# EAGLE board AniBike_v2.7_BT_SecondaryBoard (EAGLE 5.08)
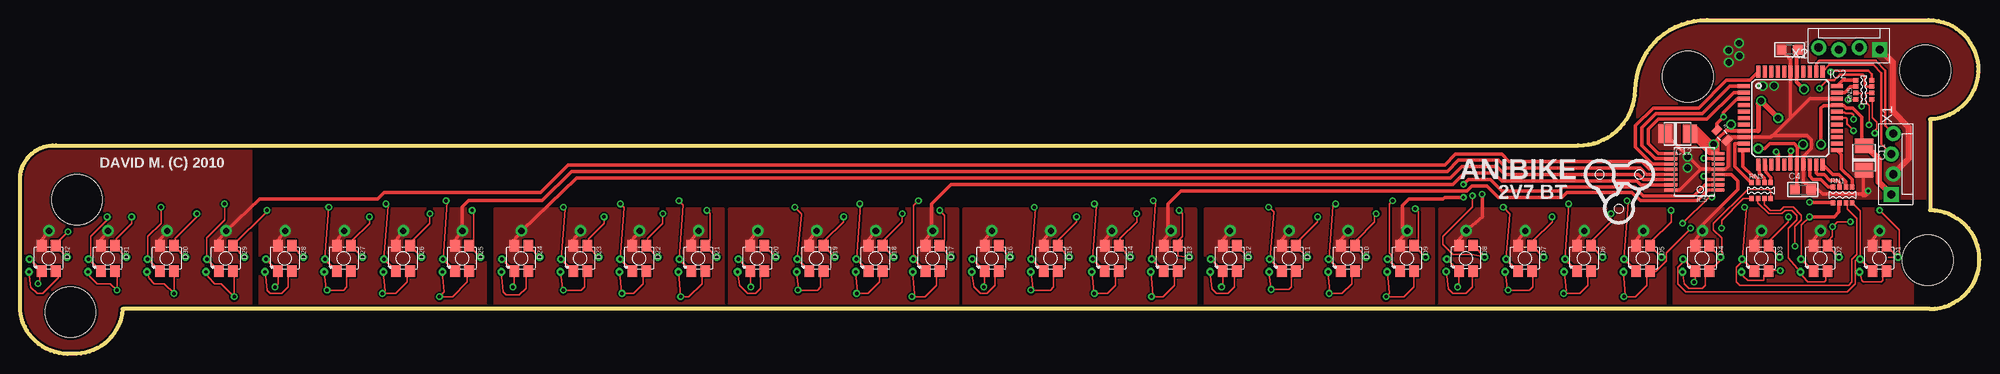
[diagram p0: board, top side]
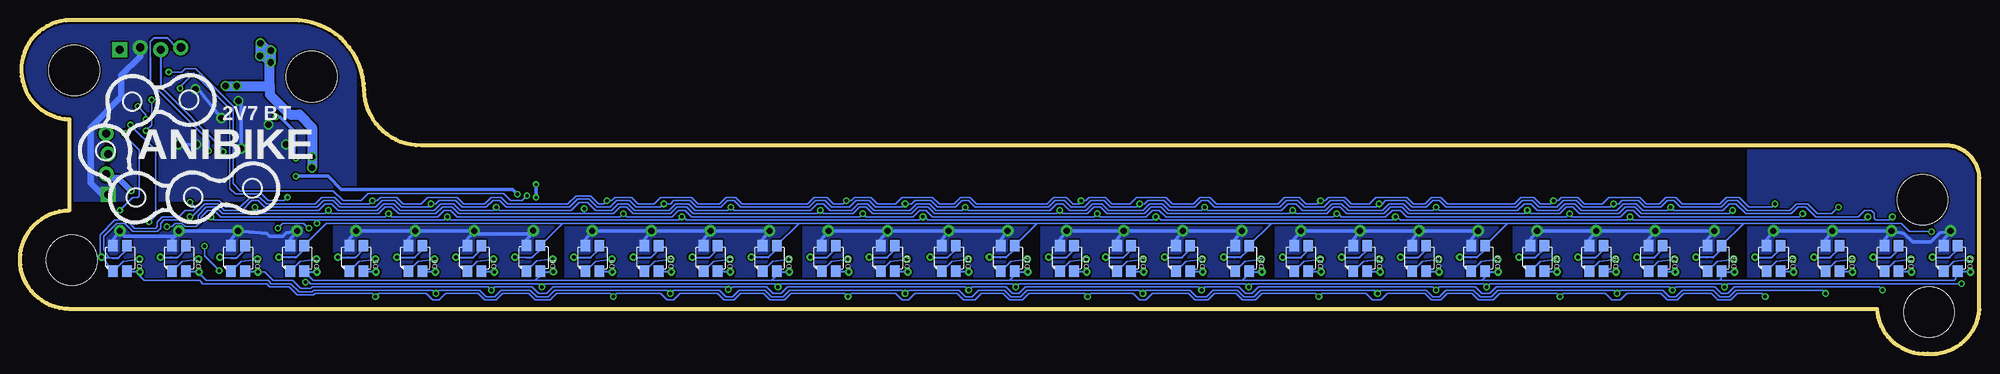
[diagram p1: board, bottom side, seen from below]

Size 244.4 x 41.68 mm. Coordinates in mm from the lower left corner, seen from the top.
Outline: 0,5.51 0,21.97 arc-90 4.47,26.03 194.36,26.03 arc90 201.47,32.94 arc-90 210.41,41.68 238.05,41.68 arc-178 238.25,29.28 238.25,17.9 arc-180 238.25,5.61 12.8,5.61 arc-90 6.5,0.02 arc-90 0,5.51
Copper layers (1*16): Top 0.035mm / dielectric 1.5mm / Bottom 0.035mm
Design rules "default *": minimum track width 7mil, minimum drill 15mil, track to track 8mil, track to pad 8mil, pad to pad 8mil, via to via 8mil, smd to smd 8mil, copper to edge 10mil, drill to drill 15mil, minimum pad ring 10mil, minimum via ring 8mil, stop-mask expansion 4mil, vias tented up to drill 32mil, thermal gap 10mil
Holes 6.35 mm at 237.95,11.71 237.64,35.38 6.3,5.2 208.03,34.62 7.11,19.22

## Footprints (pad centres in the part's own frame; a part is rotated, then mirrored left to right if it is on the bottom)
C0805 = smd 1.2 x 1.3: 1 -1.016,0; 2 1.016,0
C3528-21/T = smd 1.778 x 2.286: + 1.524,0; - -1.524,0
LED1210_DS = drill 0.432 pad 0.889 round: 1 -2.421,-0.099; 2 -2.504,-1.68; 3 2.27,0.15 | smd 1.2 x 1.4 bottom: 1_BOTTOM 0.85,-1.6; 2_BOTTOM -0.9,-1.6; 3_BOTTOM -0.9,1.6; 4_BOTTOM 0.85,1.6 | smd 1.2 x 1.4: 1_TOP -0.9,-1.6; 2_TOP 0.85,-1.6; 3_TOP 0.85,1.6; 4_TOP -0.9,1.6 | drill 0.762 pad 1.422 round: 4 0,3.454
TQFP44 = smd 1.5 x 0.5: 1 -5.8,4; 2 -5.8,3.2; 3 -5.8,2.4; 4 -5.8,1.6; 5 -5.8,0.8; 6 -5.8,0; 7 -5.8,-0.8; 8 -5.8,-1.6; 9 -5.8,-2.4; 10 -5.8,-3.2; 11 -5.8,-4; 23 5.8,-4; 24 5.8,-3.2; 25 5.8,-2.4; 26 5.8,-1.6; 27 5.8,-0.8; 28 5.8,0; 29 5.8,0.8; 30 5.8,1.6; 31 5.8,2.4; 32 5.8,3.2; 33 5.8,4 | smd 0.5 x 1.5: 12 -4,-5.8; 13 -3.2,-5.8; 14 -2.4,-5.8; 15 -1.6,-5.8; 16 -0.8,-5.8; 17 0,-5.8; 18 0.8,-5.8; 19 1.6,-5.8; 20 2.4,-5.8; 21 3.2,-5.8; 22 4,-5.8; 34 4,5.8; 35 3.2,5.8; 36 2.4,5.8; 37 1.6,5.8; 38 0.8,5.8; 39 0,5.8; 40 -0.8,5.8; 41 -1.6,5.8; 42 -2.4,5.8; 43 -3.2,5.8; 44 -4,5.8
TSSOP16 = smd 0.4 x 1.6: 1 -2.225,-2.85; 2 -1.575,-2.85; 3 -0.925,-2.85; 4 -0.275,-2.85; 5 0.375,-2.85; 6 1.025,-2.85; 7 1.675,-2.85; 8 2.325,-2.85; 9 2.325,3.05; 10 1.675,3.05; 11 1.025,3.05; 12 0.375,3.05; 13 -0.275,3.05; 14 -0.925,3.05; 15 -1.575,3.05; 16 -2.225,3.05
0805 = smd 0.8 x 1.2: 1 -0.9,0; 2 0.9,0
YCTC164 = smd 0.559 x 0.6: P$1 -1.2,-1.003; P$2 -0.4,-1.003; P$3 0.4,-1.003; P$4 1.2,-1.003; P$5 1.2,1.003; P$6 0.4,1.003; P$7 -0.4,1.003; P$8 -1.2,1.003
MOLEX-1X4_LOCK = drill 1.016 pad 1.88 square: 1 0,0.127 | drill 1.016 pad 1.88 round: 2 2.54,-0.127; 3 5.08,0.127; 4 7.62,-0.127

## Placement (x,y rotation side)
C3  100nF  [C0805]  220.73,37.97 180 top
C4  100nF  [C0805]  222.38,20.52 0 top
C11  47uF  [C3528-21/T]  230.02,24.46 270 top
C12  10uF  [C3528-21/T]  206.76,27.45 180 top
D1  LED_RGB_DS  [LED1210_DS]  231.95,11.91 0 top
D2  LED_RGB_DS  [LED1210_DS]  224.59,11.91 0 top
D3  LED_RGB_DS  [LED1210_DS]  217.22,11.91 0 top
D4  LED_RGB_DS  [LED1210_DS]  209.85,11.91 0 top
D5  LED_RGB_DS  [LED1210_DS]  202.49,11.91 0 top
D6  LED_RGB_DS  [LED1210_DS]  195.12,11.91 0 top
D7  LED_RGB_DS  [LED1210_DS]  187.76,11.91 0 top
D8  LED_RGB_DS  [LED1210_DS]  180.39,11.93 0 top
D9  LED_RGB_DS  [LED1210_DS]  173.02,11.91 0 top
D10  LED_RGB_DS  [LED1210_DS]  165.66,11.91 0 top
D11  LED_RGB_DS  [LED1210_DS]  158.29,11.91 0 top
D12  LED_RGB_DS  [LED1210_DS]  150.93,11.91 0 top
D13  LED_RGB_DS  [LED1210_DS]  143.56,11.91 0 top
D14  LED_RGB_DS  [LED1210_DS]  136.19,11.91 0 top
D15  LED_RGB_DS  [LED1210_DS]  128.57,11.91 0 top
D16  LED_RGB_DS  [LED1210_DS]  121.21,11.91 0 top
D17  LED_RGB_DS  [LED1210_DS]  113.84,11.91 0 top
D18  LED_RGB_DS  [LED1210_DS]  106.73,11.91 0 top
D19  LED_RGB_DS  [LED1210_DS]  99.36,11.91 0 top
D20  LED_RGB_DS  [LED1210_DS]  92,11.91 0 top
D21  LED_RGB_DS  [LED1210_DS]  84.63,11.91 0 top
D22  LED_RGB_DS  [LED1210_DS]  77.27,11.91 0 top
D23  LED_RGB_DS  [LED1210_DS]  69.9,11.91 0 top
D24  LED_RGB_DS  [LED1210_DS]  62.53,11.91 0 top
D25  LED_RGB_DS  [LED1210_DS]  55.17,11.91 0 top
D26  LED_RGB_DS  [LED1210_DS]  47.8,11.91 0 top
D27  LED_RGB_DS  [LED1210_DS]  40.44,11.91 0 top
D28  LED_RGB_DS  [LED1210_DS]  33.07,11.91 0 top
D29  LED_RGB_DS  [LED1210_DS]  25.7,11.91 0 top
D30  LED_RGB_DS  [LED1210_DS]  18.34,11.91 0 top
D31  LED_RGB_DS  [LED1210_DS]  10.97,11.91 0 top
D32  LED_RGB_DS  [LED1210_DS]  3.61,11.91 0 top
IC2  ATXMEGA_XX_D4TQFP44  [TQFP44]  220.83,29.43 0 top
IC5  SN74CB3Q3251TSSOP16  [TSSOP16]  208.94,22.68 90 top
R1  47k  [0805]  212.28,27.31 315 top
RN1  RESISTOR_ARR4  [YCTC164]  227.33,19.83 0 top
RN3  RESISTOR_ARR4  [YCTC164]  217.17,20.39 0 top
RN5  RESISTOR_ARR4  [YCTC164]  229.97,32.97 90 top
U$1  ANIBIKE_LOGOLOGO_3_MED  [ANIBIKE_LOGO_3_MEDIUM]  199.44,20.95 0 top
U$2  ANIBIKE_LOGOLOGO_6_BIG  [ANIBIKE_LOGO_6_BIG]  222.2,26.23 0 bottom
X1  PDI_INTERFACEHEADER0.1IN  [MOLEX-1X4_LOCK]  233.53,19.88 90 top
X2  ANIBIKE_SEC_INTERFACEHEADER0.1IN  [MOLEX-1X4_LOCK]  231.95,38.12 180 top

## Library data of the parts
C3 C11 C12 D1-D32 IC2 IC5 RN1 RN3 RN5 U$1 U$2 X1 X2 = AniBike_Common_Library
C4 = AniBike_v3.0_Library
R1 = SparkFun

## Nets
+3.6V: C3.2 C4.2 C11.+ C12.+ IC2.9 IC2.19 IC2.31 IC2.39 IC5.5 IC5.16 R1.2 X1.2 X2.1
GND: C3.1 C4.1 C11.- C12.- IC2.8 IC2.18 IC2.30 IC2.38 IC5.8 X1.1 X2.2
L1_B1: IC2.28 RN5.P$8
L1_B1_LED: D1.3 D1.3_BOTTOM D1.3_TOP D5.3 D5.3_BOTTOM D5.3_TOP D9.3 D9.3_BOTTOM D9.3_TOP D13.3 D13.3_BOTTOM D13.3_TOP D17.3 D17.3_BOTTOM D17.3_TOP D21.3 D21.3_BOTTOM D21.3_TOP D25.3 D25.3_BOTTOM D25.3_TOP D29.3 D29.3_BOTTOM D29.3_TOP RN5.P$1
L1_B2: IC2.29 RN5.P$7
L1_B2_LED: D2.3 D2.3_BOTTOM D2.3_TOP D6.3 D6.3_BOTTOM D6.3_TOP D10.3 D10.3_BOTTOM D10.3_TOP D14.3 D14.3_BOTTOM D14.3_TOP D18.3 D18.3_BOTTOM D18.3_TOP D22.3 D22.3_BOTTOM D22.3_TOP D26.3 D26.3_BOTTOM D26.3_TOP D30.3 D30.3_BOTTOM D30.3_TOP RN5.P$2
L1_B3: IC2.32 RN5.P$6
L1_B3_LED: D3.3 D3.3_BOTTOM D3.3_TOP D7.3 D7.3_BOTTOM D7.3_TOP D11.3 D11.3_BOTTOM D11.3_TOP D15.3 D15.3_BOTTOM D15.3_TOP D19.3 D19.3_BOTTOM D19.3_TOP D23.3 D23.3_BOTTOM D23.3_TOP D27.3 D27.3_BOTTOM D27.3_TOP D31.3 D31.3_BOTTOM D31.3_TOP RN5.P$3
L1_B4: IC2.33 RN5.P$5
L1_B4_LED: D4.3 D4.3_BOTTOM D4.3_TOP D8.3 D8.3_BOTTOM D8.3_TOP D12.3 D12.3_BOTTOM D12.3_TOP D16.3 D16.3_BOTTOM D16.3_TOP D20.3 D20.3_BOTTOM D20.3_TOP D24.3 D24.3_BOTTOM D24.3_TOP D28.3 D28.3_BOTTOM D28.3_TOP D32.3 D32.3_BOTTOM D32.3_TOP RN5.P$4
L1_G1: IC2.10 RN3.P$8
L1_G1_LED: D1.2 D1.2_BOTTOM D1.2_TOP D5.2 D5.2_BOTTOM D5.2_TOP D9.2 D9.2_BOTTOM D9.2_TOP D13.2 D13.2_BOTTOM D13.2_TOP D17.2 D17.2_BOTTOM D17.2_TOP D21.2 D21.2_BOTTOM D21.2_TOP D25.2 D25.2_BOTTOM D25.2_TOP D29.2 D29.2_BOTTOM D29.2_TOP RN3.P$1
L1_G2: IC2.11 RN3.P$7
L1_G2_LED: D2.2 D2.2_BOTTOM D2.2_TOP D6.2 D6.2_BOTTOM D6.2_TOP D10.2 D10.2_BOTTOM D10.2_TOP D14.2 D14.2_BOTTOM D14.2_TOP D18.2 D18.2_BOTTOM D18.2_TOP D22.2 D22.2_BOTTOM D22.2_TOP D26.2 D26.2_BOTTOM D26.2_TOP D30.2 D30.2_BOTTOM D30.2_TOP RN3.P$2
L1_G3: IC2.12 RN3.P$6
L1_G3_LED: D3.2 D3.2_BOTTOM D3.2_TOP D7.2 D7.2_BOTTOM D7.2_TOP D11.2 D11.2_BOTTOM D11.2_TOP D15.2 D15.2_BOTTOM D15.2_TOP D19.2 D19.2_BOTTOM D19.2_TOP D23.2 D23.2_BOTTOM D23.2_TOP D27.2 D27.2_BOTTOM D27.2_TOP D31.2 D31.2_BOTTOM D31.2_TOP RN3.P$3
L1_G4: IC2.13 RN3.P$5
L1_G4_LED: D4.2 D4.2_BOTTOM D4.2_TOP D8.2 D8.2_BOTTOM D8.2_TOP D12.2 D12.2_BOTTOM D12.2_TOP D16.2 D16.2_BOTTOM D16.2_TOP D20.2 D20.2_BOTTOM D20.2_TOP D24.2 D24.2_BOTTOM D24.2_TOP D28.2 D28.2_BOTTOM D28.2_TOP D32.2 D32.2_BOTTOM D32.2_TOP RN3.P$4
L1_R1: IC2.20 RN1.P$8
L1_R1_LED: D1.1 D1.1_BOTTOM D1.1_TOP D5.1 D5.1_BOTTOM D5.1_TOP D9.1 D9.1_BOTTOM D9.1_TOP D13.1 D13.1_BOTTOM D13.1_TOP D17.1 D17.1_BOTTOM D17.1_TOP D21.1 D21.1_BOTTOM D21.1_TOP D25.1 D25.1_BOTTOM D25.1_TOP D29.1 D29.1_BOTTOM D29.1_TOP RN1.P$1
L1_R2: IC2.21 RN1.P$7
L1_R2_LED: D2.1 D2.1_BOTTOM D2.1_TOP D6.1 D6.1_BOTTOM D6.1_TOP D10.1 D10.1_BOTTOM D10.1_TOP D14.1 D14.1_BOTTOM D14.1_TOP D18.1 D18.1_BOTTOM D18.1_TOP D22.1 D22.1_BOTTOM D22.1_TOP D26.1 D26.1_BOTTOM D26.1_TOP D30.1 D30.1_BOTTOM D30.1_TOP RN1.P$2
L1_R3: IC2.22 RN1.P$6
L1_R3_LED: D3.1 D3.1_BOTTOM D3.1_TOP D7.1 D7.1_BOTTOM D7.1_TOP D11.1 D11.1_BOTTOM D11.1_TOP D15.1 D15.1_BOTTOM D15.1_TOP D19.1 D19.1_BOTTOM D19.1_TOP D23.1 D23.1_BOTTOM D23.1_TOP D27.1 D27.1_BOTTOM D27.1_TOP D31.1 D31.1_BOTTOM D31.1_TOP RN1.P$3
L1_R4: IC2.23 RN1.P$5
L1_R4_LED: D4.1 D4.1_BOTTOM D4.1_TOP D8.1 D8.1_BOTTOM D8.1_TOP D12.1 D12.1_BOTTOM D12.1_TOP D16.1 D16.1_BOTTOM D16.1_TOP D20.1 D20.1_BOTTOM D20.1_TOP D24.1 D24.1_BOTTOM D24.1_TOP D28.1 D28.1_BOTTOM D28.1_TOP D32.1 D32.1_BOTTOM D32.1_TOP RN1.P$4
MUX_D0: IC2.44 IC5.11
MUX_D1: IC2.1 IC5.10
MUX_D2: IC2.2 IC5.9
MUX_EN: IC2.3 IC5.7 R1.1
PDI_CLOCK: IC2.35 X1.4
PDI_DATA: IC2.34 X1.3
ROW1_LED: D1.4 D1.4_BOTTOM D1.4_TOP D2.4 D2.4_BOTTOM D2.4_TOP D3.4 D3.4_BOTTOM D3.4_TOP D4.4 D4.4_BOTTOM D4.4_TOP IC5.4
ROW2_LED: D5.4 D5.4_BOTTOM D5.4_TOP D6.4 D6.4_BOTTOM D6.4_TOP D7.4 D7.4_BOTTOM D7.4_TOP D8.4 D8.4_BOTTOM D8.4_TOP IC5.3
ROW3_LED: D9.4 D9.4_BOTTOM D9.4_TOP D10.4 D10.4_BOTTOM D10.4_TOP D11.4 D11.4_BOTTOM D11.4_TOP D12.4 D12.4_BOTTOM D12.4_TOP IC5.2
ROW4_LED: D13.4 D13.4_BOTTOM D13.4_TOP D14.4 D14.4_BOTTOM D14.4_TOP D15.4 D15.4_BOTTOM D15.4_TOP D16.4 D16.4_BOTTOM D16.4_TOP IC5.1
ROW5_LED: D17.4 D17.4_BOTTOM D17.4_TOP D18.4 D18.4_BOTTOM D18.4_TOP D19.4 D19.4_BOTTOM D19.4_TOP D20.4 D20.4_BOTTOM D20.4_TOP IC5.15
ROW6_LED: D21.4 D21.4_BOTTOM D21.4_TOP D22.4 D22.4_BOTTOM D22.4_TOP D23.4 D23.4_BOTTOM D23.4_TOP D24.4 D24.4_BOTTOM D24.4_TOP IC5.14
ROW7_LED: D25.4 D25.4_BOTTOM D25.4_TOP D26.4 D26.4_BOTTOM D26.4_TOP D27.4 D27.4_BOTTOM D27.4_TOP D28.4 D28.4_BOTTOM D28.4_TOP IC5.13
ROW8_LED: D29.4 D29.4_BOTTOM D29.4_TOP D30.4 D30.4_BOTTOM D30.4_TOP D31.4 D31.4_BOTTOM D31.4_TOP D32.4 D32.4_BOTTOM D32.4_TOP IC5.12
SEC_CS: IC2.14
SEC_MISO: IC2.16
SEC_MOSI: IC2.15 X2.3
SEC_SCK: IC2.17 X2.4

## Tracks (layer width: path | path; a pad name or v marks a point on that pad's centre or on a via)
+3.6V  (via drill 0.41, 0.8)
  Top 0.406: 209.63,23.05 C12.+ | 209.63,23.05 IC5.5 212.72,23.05 213.06,23.39 213.06,26.64 213.46,27.05 215.02,27.05 IC2.9 215.04,27.05 218.34,27.05 218.64,27.25 | 209.63,23.05 207.03,20.45 IC5.16 | C3.2 220.83,36.75 IC2.39 220.83,29.43 | C11.+ 229.92,22.22 229.92,19.94 224.84,19.94 224.26,20.52 C4.2 222.43,21.48 IC2.19 222.43,24.63 223.42,25.62 223.42,26.74 222.91,27.25 218.64,27.25 | 218.64,27.25 220.83,29.43 | 220.83,29.43 223.23,31.83 IC2.31
  Top 0.813: X2.1 231.98,37.99 233.58,36.39 233.58,30.3 235.61,28.27 235.61,24.38 X1.2 233.66,22.45 | v230.53,20.34 230.12,19.94 229.92,19.94
  Bottom 0.813: X1.2 233.2,21.97 232.16,21.97 v230.53,20.34
  Bottom 1.27: v218.8,33.45 213.23,33.45 | 213.23,33.45 213.23,32.38 210.74,29.89 209.58,29.89 209.42,29.74 207.98,28.27 v207.98,24.61 v207.98,23.21 | 213.23,33.45 213.23,36.27 213.08,36.42 213.08,37.92 213.56,37.92 214.43,38.78 214.43,37.18 214.45,37.16 213.94,37.16 213.16,36.37
  other vias: 217.37,33.45 213.13,36.39 213.08,37.89 214.45,37.18 214.4,38.78
  pour Top (no thermals): 244.55,43.51 201.78,43.51 201.78,19.43 244.55,19.43
GND  (via drill 0.8)
  Top 0.203: IC5.8 211.8,25.02
  Top 0.406: C12.- 210.73,25 IC5.8 211.79,26.4 | 212.8,27.86 211.79,26.85 211.79,26.4 | 221.63,37.75 C3.1 | C11.- 229.72,26.49 229.72,29.59 228.6,30.7 227.79,30.7 227.48,31.01 227.38,31.01 IC2.30 226.6,31.01 224.99,31.01 224.64,30.65 v224.64,26.13 | C4.1 221.63,20.79 IC2.18 221.69,23.7 221.69,25.83 | 221.69,25.83 221.29,26.23 218.24,26.23 217.63,25.62 v216.81,25.62 | 216.81,27.86 216.79,27.83 | v222.4,26.13 222.1,25.83 221.69,25.83 | 211.79,26.4 211.74,26.4 211.44,26.11 211.44,25.08 211.1,25.08 211.09,25.09 211.09,25.29 | 211.09,25.29 211.09,26.06 211.11,26.08 211.11,26.16 211.53,26.58 | 211.53,26.58 211.71,26.76 | 211.09,25.29 210.81,25.29 209.03,27.07 209.03,27.44 208.99,27.48 208.99,27.45 211.11,25.33 211.11,25.75 208.95,27.91 208.95,28.2 208.97,28.22 209.19,28.22 211.07,26.34 | 211.53,26.58 210.76,26.58 210.38,26.96
  Top 0.508: 212.8,27.86 213.58,27.83 IC2.8 216.79,27.83 | 221.63,37.75 IC2.38 221.63,33.92 v222.5,33.04
  Top 0.61: 216.81,27.86 216.81,31.21 v217.17,31.57 v219.3,29.43 | v213.4,28.62 213.4,27.91
  Top 0.813: X1.1 231.85,21.43 231.85,24.3 230.18,25.98 C11.-
  Bottom 0.406: v216.81,25.62 216.81,31.21 v217.17,31.57 | v219.3,29.43 222.2,33.04 v222.5,33.04 | v224.64,26.13 v222.4,26.13
  Bottom 0.813: X2.2 229.41,37.11 231.75,34.77 231.75,32.13 235.61,28.27 235.61,21.36 234.19,19.94 233.45,19.94 X1.1
  other vias: 211.25,26.13
  pour Bottom (no thermals): 236.93,43.71 202.59,43.71 202.59,19.22 244.75,19.22 244.75,39.65
L1_B1  (via drill 0.41)
  Top 0.203: v227.99,31.72 228.72,31.72 RN5.P$8
  Top 0.254: IC2.28 227.74,29.43 227.89,29.28 227.89,28.67 v228.7,27.86
  Bottom 0.203: v228.7,27.86 227.99,28.57 v227.99,31.72
L1_B1_LED  (via drill 0.41, 0.43)
  Top 0.203: 203.49,13.36 203.49,14.03 205.94,16.48 v205.94,17.9 | D29.3_TOP 30.79,17.74 v30.79,17.9 | v56.39,17.9 56.59,17.7 56.59,14.04 56.06,13.51 D25.3_TOP 56.17,13.36 D25.3 | v85.65,17.9 86.06,17.5 86.06,14.25 85.48,13.67 D21.3_TOP 85.63,13.36 D21.3 | v114.71,17.9 115.32,17.29 115.32,14.25 114.69,13.62 D17.3_TOP 114.84,13.36 D17.3 | v144.58,17.9 144.98,17.5 144.98,14.65 144.41,14.08 D13.3_TOP 144.41,12.21 D13.3 | v174.04,18.11 174.45,17.7 174.45,14.25 173.88,13.67 D9.3_TOP | D1.3_TOP 232.84,13.51 | RN5.P$1 231.04,31.7 231.04,29.49 231.6,28.93 231.6,28.11 231.34,27.86 v231.34,27.56 231.34,27.66 | D1.3 233,12.01 233.99,12.01 234.39,12.42 234.39,15.46 v231.95,17.9
  Top 0.254: D1.3 232.95,13.36 D1.3_TOP | D5.3 203.49,13.36 D5.3_TOP | D9.3 174.03,13.36 D9.3_TOP | D29.3_TOP 26.71,13.36 D29.3
  Bottom 0.203: v30.79,17.9 31.19,17.5 42.16,17.5 42.98,18.31 44.2,18.31 45.01,17.5 49.89,17.5 50.7,18.31 51.51,18.31 52.32,17.5 55.98,17.5 v56.39,17.9 56.79,17.5 71.22,17.5 72.03,18.31 73.46,18.31 74.27,17.5 78.94,17.5 79.76,18.31 80.57,18.31 81.38,17.5 85.24,17.5 v85.65,17.9 86.06,17.5 101.3,17.5 102.11,18.31 103.33,18.31 104.14,17.5 108.81,17.5 109.63,18.31 110.44,18.31 111.25,17.5 114.3,17.5 v114.71,17.9 115.11,17.5 130.35,17.5 131.17,18.31 132.38,18.31 133.2,17.5 138.07,17.5 138.89,18.31 139.7,18.31 140.51,17.5 144.17,17.5 v144.58,17.9 144.98,17.5 160.43,17.5 161.24,18.31 162.46,18.31 163.27,17.5 167.94,17.5 168.76,18.31 169.57,18.31 170.38,17.5 174.04,17.5 | 174.04,17.5 v174.04,18.11 | 174.04,17.5 189.69,17.5 190.5,18.31 191.72,18.31 192.53,17.5 197.21,17.5 198.02,18.31 198.83,18.31 199.64,17.5 205.54,17.5 v205.94,17.9 206.35,17.5 219.15,17.5 219.96,18.31 221.18,18.31 222.2,17.29 222.2,16.68 222.61,16.28 223.62,16.28 224.03,16.68 226.47,16.68 226.87,16.28 226.87,15.67 227.28,15.26 230.33,15.26 231.34,16.28 232.36,16.28 233.99,14.65 233.99,13.03 233.32,12.06 D1.3 | v231.95,17.9 230.33,19.53 229.72,19.53 229.51,19.73 229.51,25.42 231.34,27.25 v231.34,27.56
  Bottom 0.254: D1.3_BOTTOM 231.05,13.04 232.13,11.96 232.85,11.96 D1.3 | D5.3_BOTTOM 201.59,13.04 202.56,12.06 203.49,12.06 D5.3 | D9.3_BOTTOM 172.12,13.11 173.23,12.01 173.98,12.01 D9.3 | D13.3_BOTTOM 142.66,13.11 143.76,12.01 144.51,12.01 D13.3 | D17.3_BOTTOM 112.94,12.96 113.89,12.01 114.79,12.01 D17.3 | D21.3_BOTTOM 83.73,12.91 84.63,12.01 85.58,12.01 D21.3 | D25.3_BOTTOM 54.27,13.11 55.37,12.01 56.12,12.01 D25.3 | D29.3_BOTTOM 24.81,13.11 25.91,12.01 26.66,12.01 D29.3
L1_B2  (via drill 0.41)
  Top 0.203: 226.77,30.1 226.67,30.2 IC2.29 226.77,30.1 | v229.72,30.91 229.72,32.33 229.51,32.53 228.8,32.53 RN5.P$7
  Top 0.254: v228.7,29.28 228.7,29.79 228.5,29.99 227.69,29.99 227.58,30.1 226.77,30.1
  Bottom 0.203: v228.7,29.28 228.7,29.89 v229.72,30.91
L1_B2_LED  (via drill 0.41, 0.43)
  Top 0.203: 19.34,13.36 19.34,14.38 22.05,17.09 v22.05,17.5 | 48.8,13.36 48.8,13.98 51.11,16.28 v51.11,17.5 | 78.27,13.36 78.27,14.38 80.16,16.28 v80.16,17.5 | 107.73,13.36 107.73,14.18 110.03,16.48 v110.03,17.5 | 137.19,13.36 137.19,14.38 139.29,16.48 v139.29,17.5 | 166.66,13.36 166.66,14.18 168.96,16.48 168.96,17.29 v169.16,17.5 | 196.12,13.36 196.12,14.18 198.43,16.48 v198.43,17.5 | 225.59,14.18 226.06,14.65 v226.06,15.87 226.67,16.48 v228.3,16.48 | RN5.P$2 230.94,32.53 230.33,32.53 230.23,32.43 230.23,31.42 230.63,31.01 v230.63,28.57
  Top 0.254: 225.59,13.36 D2.3 | 225.59,13.36 D2.3_TOP | D6.3 196.12,13.36 D6.3_TOP | D10.3 166.66,13.36 D10.3_TOP | D14.3 137.19,13.36 D14.3_TOP | D18.3 107.73,13.36 D18.3_TOP | D22.3 78.27,13.36 D22.3_TOP | D26.3 48.8,13.36 D26.3_TOP | D30.3 19.34,13.36 D30.3_TOP | 225.59,14.18 225.59,13.36
  Bottom 0.203: v22.05,17.5 22.45,17.09 42.37,17.09 43.18,17.9 43.99,17.9 44.81,17.09 50.9,17.09 51.11,17.29 v51.11,17.5 51.51,17.09 71.43,17.09 72.24,17.9 73.25,17.9 74.07,17.09 79.55,17.09 79.96,17.5 v80.16,17.5 80.57,17.09 101.5,17.09 102.31,17.9 103.12,17.9 103.94,17.09 109.63,17.09 v110.03,17.5 110.44,17.09 130.56,17.09 131.37,17.9 132.18,17.9 132.99,17.09 138.89,17.09 v139.29,17.5 139.7,17.09 160.63,17.09 161.44,17.9 162.25,17.9 163.07,17.09 168.76,17.09 v169.16,17.5 169.57,17.09 189.89,17.09 190.7,17.9 191.52,17.9 192.33,17.09 198.02,17.09 v198.43,17.5 198.83,17.09 219.35,17.09 220.17,17.9 220.98,17.9 221.79,17.09 221.79,16.48 222.4,15.87 223.83,15.87 224.23,16.28 225.04,16.28 225.45,15.87 v226.06,15.87 | v228.3,16.48 227.48,17.29 227.48,25.42 v230.63,28.57
  Bottom 0.254: D2.3_BOTTOM 223.69,13.14 224.77,12.06 225.58,12.06 D2.3 | D6.3_BOTTOM 194.22,12.96 195.17,12.01 196.07,12.01 D6.3 | D10.3_BOTTOM 164.76,12.96 165.71,12.01 166.61,12.01 D10.3 | D14.3_BOTTOM 135.3,12.96 136.25,12.01 137.15,12.01 D14.3 | D18.3_BOTTOM 105.83,12.96 106.78,12.01 107.68,12.01 D18.3 | D22.3_BOTTOM 76.37,12.96 77.32,12.01 78.22,12.01 D22.3 | D26.3_BOTTOM 46.9,12.96 47.85,12.01 48.75,12.01 D26.3 | D30.3_BOTTOM 17.44,13.16 18.59,12.01 19.29,12.01 D30.3
L1_B3
  Top 0.406: IC2.32 227.58,32.63 228.31,33.37 RN5.P$6
L1_B3_LED  (via drill 0.41, 0.43)
  Top 0.203: 11.97,13.36 11.97,14.33 13.92,16.28 v13.92,17.09 | 41.44,13.36 41.44,14.13 43.59,16.28 v43.59,17.09 | 70.9,13.36 70.9,14.33 72.85,16.28 v72.85,17.09 | 100.37,13.36 100.37,14.13 102.72,16.48 v102.72,17.09 | 129.58,13.36 129.58,14.28 131.78,16.48 v131.78,17.09 | 159.29,13.36 159.29,13.92 161.85,16.48 v161.85,17.09 | 188.76,13.36 188.76,14.13 191.11,16.48 v191.11,17.09 | 218.22,13.36 218.22,14.13 220.57,16.48 v220.57,17.09 | v211.02,19.53 210.62,19.53 v207.37,16.28
  Top 0.254: D3.3 218.22,13.36 D3.3_TOP | D7.3 188.76,13.36 D7.3_TOP | D11.3 159.29,13.36 D11.3_TOP | D15.3 129.58,13.36 D15.3_TOP | D19.3 100.37,13.36 D19.3_TOP | D23.3 70.9,13.36 D23.3_TOP | D27.3 41.44,13.36 D27.3_TOP | D31.3 11.97,13.36 D31.3_TOP
  Top 0.305: RN5.P$3 230.31,33.37 230.12,33.55 230.12,34.57 229.82,34.87 226.97,34.87 226.26,34.16 225.45,34.16 v224.43,33.14
  Bottom 0.203: v13.92,17.09 14.33,16.68 43.18,16.68 v43.59,17.09 43.99,16.68 72.24,16.68 72.64,17.09 v72.85,17.09 73.25,16.68 102.11,16.68 102.51,17.09 v102.72,17.09 103.12,16.68 131.17,16.68 131.57,17.09 v131.78,17.09 132.18,16.68 161.24,16.68 161.65,17.09 v161.85,17.09 162.25,16.68 190.7,16.68 v191.11,17.09 191.52,16.68 207.37,16.68 | 207.37,16.68 220.17,16.68 v220.57,17.09 | v211.02,19.53 211.43,19.12 213.46,19.12 214.27,19.94 217.53,19.94 218.24,20.65 218.24,30.6 222.71,35.07 224.43,33.35 v224.43,33.14 | v207.37,16.28 207.37,16.68
  Bottom 0.254: D3.3_BOTTOM 216.32,13.04 217.4,11.96 218.12,11.96 D3.3 | D7.3_BOTTOM 186.86,13.01 187.86,12.01 188.71,12.01 D7.3 | D11.3_BOTTOM 157.39,13.01 158.39,12.01 159.24,12.01 D11.3 | D15.3_BOTTOM 127.68,13.06 128.73,12.01 129.53,12.01 D15.3 | D19.3_BOTTOM 98.47,13.01 99.47,12.01 100.32,12.01 D19.3 | D23.3_BOTTOM 69,13.01 70,12.01 70.85,12.01 D23.3 | D27.3_BOTTOM 39.54,13.01 40.54,12.01 41.39,12.01 D27.3 | D31.3_BOTTOM 10.07,13.01 11.07,12.01 11.92,12.01 D31.3
L1_B4
  Top 0.406: IC2.33 227.36,34.17 RN5.P$5
L1_B4_LED  (via drill 0.41, 0.43)
  Top 0.203: 4.61,13.36 4.61,13.87 v5.99,15.26 | v181.15,19.73 181.15,18.31 177.5,14.65 177.5,13.64 178.71,12.42 181.06,12.42 D8.3
  Top 0.254: D4.3 210.86,13.36 D4.3_TOP | D8.3 181.39,13.38 D8.3_TOP | D12.3 151.93,13.36 D12.3_TOP | D16.3 122.21,13.36 D16.3_TOP | D20.3 93,13.36 D20.3_TOP | D24.3 63.54,13.36 D24.3_TOP | D32.3 4.61,13.36 D32.3_TOP | D28.3_TOP 34.07,13.36 D28.3
  Top 0.305: RN5.P$4 230.98,34.93 230.53,35.38 226.06,35.38 v225.86,35.18
  Bottom 0.203: 29.4,16.28 9.75,16.28 8.74,15.26 v5.99,15.26 | 29.4,16.28 D28.3_BOTTOM | 58.87,16.28 29.4,16.28 | 58.87,16.28 D24.3_BOTTOM | 88.33,16.28 58.87,16.28 | 88.33,16.28 D20.3_BOTTOM | 117.54,16.28 88.33,16.28 | 117.54,16.28 D16.3_BOTTOM | 147.26,16.28 117.54,16.28 | 147.26,16.28 D12.3_BOTTOM | 176.75,16.28 147.26,16.28 | D8.3_BOTTOM 176.75,16.28 | 176.75,16.28 206.19,16.28 D4.3_BOTTOM | v181.15,19.73 181.76,19.12 183.19,19.12 184.1,20.04 200.97,20.04 201.88,19.12 204.11,19.12 205.33,20.34 216.92,20.34 217.83,21.26 217.83,30.91 222.5,35.58 223.83,35.58 224.23,35.18 v225.86,35.18
  Bottom 0.254: D4.3_BOTTOM 208.96,13.04 209.98,12.01 210.81,12.01 D4.3 | D8.3_BOTTOM 179.49,13.06 180.54,12.01 181.32,12.01 D8.3 | D12.3_BOTTOM 150.03,13.06 151.08,12.01 151.88,12.01 D12.3 | D16.3_BOTTOM 120.31,13.11 121.41,12.01 122.16,12.01 D16.3 | D20.3_BOTTOM 91.1,13.06 92.15,12.01 92.95,12.01 D20.3 | D24.3_BOTTOM 61.64,13.06 62.69,12.01 63.49,12.01 D24.3 | D28.3_BOTTOM 32.17,13.06 33.22,12.01 34.02,12.01 D28.3 | D32.3_BOTTOM 2.71,13.06 3.76,12.01 4.56,12.01 D32.3
L1_G1
  Top 0.406: IC2.10 213.87,26.23 213.87,23.39 215.86,21.4 RN3.P$8
L1_G1_LED  (via drill 0.41, 0.43)
  Top 0.203: 26.62,10.49 26.72,10.38 v26.72,7.13 25.09,8.76 24.28,8.76 23.46,9.59 D29.2 | 26.62,10.49 26.56,10.55 | D25.2 52.92,7.73 v52.32,7.13 53.95,7.13 55.78,8.96 55.78,10.07 D25.2_TOP | D21.2 82.38,7.15 v82.4,7.13 83.41,7.13 85.04,8.76 85.04,9.87 D21.2_TOP | D17.2 111.59,7.47 v111.25,7.13 112.88,7.13 114.3,8.56 114.3,9.92 D17.2_TOP | D13.2 141.31,7.32 v141.12,7.13 142.55,7.13 143.97,8.56 143.97,9.87 D13.2_TOP | D9.2 170.78,7.53 v170.38,7.13 172.62,7.13 173.84,8.35 173.84,10.27 D9.2_TOP | D5.2 200.24,7.32 v200.05,7.13 201.47,7.13 202.9,8.56 202.9,9.87 D5.2_TOP 204.04,10.31 205.33,11.6 205.33,12.62 v208.38,15.67 | D1.2_TOP 232.36,9.87 232.36,9.17 232.16,8.96 229.92,8.96 229.7,9.18 D1.2 | D29.2_TOP 26.56,10.42 26.62,10.49 | v212.24,15.67 212.24,16.68 214.88,19.33 214.95,19.39 RN3.P$1
  Bottom 0.203: v26.72,7.13 27.13,7.54 30.18,7.54 30.99,6.73 32.61,6.73 33.43,7.54 36.88,7.54 37.69,6.73 38.91,6.73 39.73,7.54 43.99,7.54 44.81,6.73 45.82,6.73 46.63,7.54 51.92,7.54 v52.32,7.13 52.73,7.54 59.84,7.54 60.66,6.73 62.48,6.73 63.3,7.54 66.34,7.54 67.16,6.73 68.38,6.73 69.19,7.54 73.86,7.54 74.68,6.73 75.69,6.73 76.51,7.54 81.99,7.54 v82.4,7.13 82.8,7.54 89.51,7.54 90.32,6.73 91.95,6.73 92.76,7.54 95.4,7.54 96.22,6.73 97.84,6.73 98.65,7.54 103.12,7.54 103.94,6.73 104.75,6.73 105.56,7.54 110.85,7.54 v111.25,7.13 111.66,7.54 118.57,7.54 119.38,6.73 121.01,6.73 121.82,7.54 124.46,7.54 125.27,6.73 126.7,6.73 127.51,7.54 132.79,7.54 133.6,6.73 134.42,6.73 135.23,7.54 140.72,7.54 v141.12,7.13 141.53,7.54 148.23,7.54 149.05,6.73 150.88,6.73 151.69,7.54 154.53,7.54 155.35,6.73 156.57,6.73 157.38,7.54 162.05,7.54 162.87,6.73 163.68,6.73 164.49,7.54 169.98,7.54 v170.38,7.13 170.79,7.54 177.5,7.54 178.31,6.73 180.14,6.73 180.95,7.54 184.2,7.54 185.01,6.73 186.44,6.73 187.25,7.54 191.31,7.54 192.13,6.73 192.94,6.73 193.75,7.54 199.64,7.54 v200.05,7.13 200.46,7.54 207.57,7.54 207.77,7.34 209.8,7.34 210.82,8.35 213.26,8.35 213.67,8.76 221.59,8.76 222,9.17 228.91,9.17 229.7,9.96 D1.2 | v212.24,15.67 211.63,16.28 208.99,16.28 v208.38,15.67
  Bottom 0.254: D29.2 24.73,10.23 D29.2_BOTTOM | D25.2 54.19,10.23 D25.2_BOTTOM | D21.2 83.65,10.23 D21.2_BOTTOM | D17.2 112.86,10.23 D17.2_BOTTOM | D13.2 142.58,10.23 D13.2_BOTTOM | D9.2 172.05,10.23 D9.2_BOTTOM | D5.2 201.51,10.23 D5.2_BOTTOM | D1.2 230.97,10.23 D1.2_BOTTOM
L1_G2
  Top 0.406: IC2.11 214.88,25.29 214.88,23.39 216.1,22.17 216.41,22.17 216.77,21.81 RN3.P$7
L1_G2_LED  (via drill 0.43)
  Top 0.203: 19.19,10.6 19.2,10.59 19.2,10.32 | 19.2,10.32 v19.2,7.54 17.98,8.76 16.76,8.76 16.09,9.43 D30.2 | D26.2 45.55,7.88 v45.21,7.54 46.84,7.54 48.26,8.96 48.26,9.92 D26.2_TOP | D22.2 75.02,7.61 v75.08,7.54 76.51,7.54 77.72,8.76 77.72,9.92 D22.2_TOP | D18.2 104.48,7.68 v104.34,7.54 105.77,7.54 107.19,8.96 107.19,9.92 D18.2_TOP | D14.2 133.94,7.61 v134.01,7.54 135.64,7.54 136.65,8.56 136.65,9.92 D14.2_TOP | D10.2 163.41,7.68 v163.27,7.54 164.9,7.54 166.12,8.76 166.12,9.92 D10.2_TOP | D6.2 192.87,7.88 v192.53,7.54 194.56,7.54 195.58,8.56 195.58,9.92 D6.2_TOP | D2.2_TOP 225.25,10.12 225.25,9.17 225.04,8.96 223.01,8.96 222.34,9.64 D2.2 220.57,11.99 220.57,15.67 221.59,16.68 221.59,17.29 220.98,17.9 220.17,17.9 219.76,17.5 218.14,17.5 216.77,18.86 RN3.P$2 | 19.2,10.32 D30.2_TOP
  Bottom 0.203: v19.2,7.54 19.61,7.95 30.38,7.95 31.19,7.13 32.41,7.13 33.22,7.95 37.08,7.95 37.9,7.13 38.71,7.13 39.52,7.95 44.81,7.95 v45.21,7.54 45.62,7.95 60.05,7.95 60.86,7.13 62.28,7.13 63.09,7.95 66.55,7.95 67.36,7.13 68.17,7.13 68.99,7.95 74.68,7.95 v75.08,7.54 75.49,7.95 89.71,7.95 90.53,7.13 91.75,7.13 92.56,7.95 95.61,7.95 96.42,7.13 97.64,7.13 98.45,7.95 103.94,7.95 v104.34,7.54 104.75,7.95 118.77,7.95 119.58,7.13 120.8,7.13 121.62,7.95 124.87,7.95 125.68,7.13 126.49,7.13 127.31,7.95 133.6,7.95 v134.01,7.54 134.42,7.95 148.44,7.95 149.25,7.13 150.67,7.13 151.49,7.95 154.74,7.95 155.55,7.13 156.36,7.13 157.18,7.95 162.87,7.95 v163.27,7.54 163.68,7.95 177.7,7.95 178.51,7.13 179.93,7.13 180.75,7.95 184.4,7.95 185.22,7.13 186.23,7.13 187.05,7.95 192.13,7.95 v192.53,7.54 192.94,7.95 207.77,7.95 207.98,7.74 209.6,7.74 210.62,8.76 213.06,8.76 213.46,9.17 221.18,9.17 222.25,10.23 D2.2
  Bottom 0.254: D30.2 17.36,10.23 D30.2_BOTTOM | D26.2 46.82,10.23 D26.2_BOTTOM | D22.2 76.29,10.23 D22.2_BOTTOM | D18.2 105.75,10.23 D18.2_BOTTOM | D14.2 135.22,10.23 D14.2_BOTTOM | D10.2 164.68,10.23 D10.2_BOTTOM | D6.2 194.14,10.23 D6.2_BOTTOM | D2.2 223.61,10.23 D2.2_BOTTOM
L1_G3
  Top 0.406: IC2.12 216.92,23.55 216.92,22.58 217.57,21.92 RN3.P$6
L1_G3_LED  (via drill 0.41, 0.43)
  Top 0.203: 11.89,10.38 12.09,10.18 v12.09,7.95 11.28,8.76 9.65,8.76 8.72,9.69 D31.2 | 11.89,10.38 11.82,10.45 | D27.2 38.19,8.06 v38.3,7.95 40.34,7.95 40.74,8.35 40.74,9.76 D27.2_TOP | D23.2 67.65,8.06 v67.77,7.95 70,7.95 70.41,8.35 70.41,9.97 D23.2_TOP | D19.2 97.12,8.03 v97.03,7.95 99.47,7.95 99.87,8.35 99.87,9.97 D19.2_TOP | D15.2 126.33,8.19 v126.09,7.95 128.52,7.95 128.93,8.35 128.93,9.81 D15.2_TOP | D11.2 v156.04,8.03 158.28,8.03 158.6,8.35 158.6,9.76 D11.2_TOP | D7.2 185.51,8.06 v185.62,7.95 188.27,7.95 188.67,8.35 188.67,10.24 D7.2_TOP | D3.2 214.97,9.69 215.49,9.17 217.53,9.17 217.53,9.76 D3.2_TOP 218.15,10.38 v219.56,10.38 | D31.2_TOP 11.89,10.37 11.89,10.38 | RN3.P$3 217.57,18.67 218.34,17.9 219.56,17.9 219.96,18.31 221.18,18.31 222.2,17.29 222.2,16.68 221.39,15.87 v221.39,13.43
  Bottom 0.203: v12.09,7.95 12.5,8.35 30.58,8.35 31.39,7.54 32.21,7.54 33.02,8.35 37.9,8.35 v38.3,7.95 38.71,8.35 60.25,8.35 61.06,7.54 62.08,7.54 62.89,8.35 67.36,8.35 v67.77,7.95 68.17,8.35 89.92,8.35 90.73,7.54 91.54,7.54 92.35,8.35 96.62,8.35 v97.03,7.95 97.43,8.35 118.97,8.35 119.79,7.54 120.6,7.54 121.41,8.35 125.68,8.35 v126.09,7.95 126.49,8.35 148.64,8.35 149.45,7.54 150.47,7.54 151.28,8.35 155.55,8.35 155.96,7.95 v156.04,8.03 156.36,8.35 177.9,8.35 178.71,7.54 179.73,7.54 180.54,8.35 185.22,8.35 v185.62,7.95 186.03,8.35 207.98,8.35 208.18,8.15 209.4,8.15 210.41,9.17 212.85,9.17 213.92,10.23 D3.2 | v221.39,13.43 221.39,12.21 v219.56,10.38
  Bottom 0.254: D31.2 9.99,10.23 D31.2_BOTTOM | D27.2 39.46,10.23 D27.2_BOTTOM | D23.2 68.92,10.23 D23.2_BOTTOM | D19.2 98.39,10.23 D19.2_BOTTOM | D15.2 127.6,10.23 D15.2_BOTTOM | D11.2 157.31,10.23 D11.2_BOTTOM | D7.2 186.78,10.23 D7.2_BOTTOM | D3.2 216.24,10.23 D3.2_BOTTOM
L1_G4
  Top 0.406: IC2.13 217.73,23.53 217.73,22.68 218.37,22.04 RN3.P$5
L1_G4_LED
  Top 0.203: D32.2_TOP 4.78,9.99 4.78,9.47 2.84,7.54 2.13,7.54 1.36,8.32 D32.2 | D28.2_TOP 33.43,9.81 33.43,8.35 32.61,7.54 31.19,7.54 30.82,7.91 D28.2 | D24.2_TOP 63.09,10.02 63.09,8.15 62.28,7.34 60.66,7.34 60.29,7.71 D24.2 | D20.2_TOP 92.35,9.81 92.35,8.15 91.75,7.54 90.73,7.54 89.75,8.52 D20.2 | D16.2_TOP 121.62,9.87 121.62,8.56 120.6,7.54 119.79,7.54 118.96,8.37 D16.2 | D12.2_TOP 151.49,10.02 151.49,8.35 150.67,7.54 149.25,7.54 148.68,8.11 D12.2 | D8.2_TOP 181.15,10.25 181.15,8.35 180.34,7.54 178.71,7.54 178.14,8.11 D8.2 | D4.2 207.61,8.72 208.18,8.15 209.8,8.15 210.21,8.56 210.21,9.81 D4.2_TOP 212.24,11.85 212.24,14.45 211.23,15.46 211.23,16.28 215.49,20.54 218.14,20.54 218.37,20.31 RN3.P$4
  Bottom 0.203: 208.88,10.23 207.81,9.17 180.14,9.17 | 180.14,9.17 179.49,9.81 D8.2_BOTTOM | 150.67,9.17 180.14,9.17 | 150.67,9.17 150.03,9.81 D12.2_BOTTOM | 121.01,9.17 150.67,9.17 | 121.01,9.17 120.31,9.86 D16.2_BOTTOM | 91.95,9.17 121.01,9.17 | 91.95,9.17 91.1,10.01 D20.2_BOTTOM | 62.08,9.17 91.95,9.17 | 62.08,9.17 61.64,9.61 D24.2_BOTTOM | 32.41,9.17 62.08,9.17 | 32.41,9.17 32.21,9.37 32.21,10.27 D28.2_BOTTOM | 32.41,9.17 3.15,9.17 2.95,9.37 2.95,10.07 D32.2_BOTTOM
  Bottom 0.254: D32.2 2.63,10.23 D32.2_BOTTOM | D28.2 32.09,10.23 D28.2_BOTTOM | D24.2 61.56,10.23 D24.2_BOTTOM | D20.2 91.02,10.23 D20.2_BOTTOM | D16.2 120.23,10.23 D16.2_BOTTOM | D12.2 149.95,10.23 D12.2_BOTTOM | D8.2 179.41,10.25 D8.2_BOTTOM | D4.2 208.88,10.23 D4.2_BOTTOM
L1_R1
  Top 0.406: IC2.20 223.22,23.62 223.22,22.17 223.62,21.76 224.64,21.76 225.56,20.84 RN1.P$8
L1_R1_LED  (via drill 0.41, 0.43)
  Top 0.203: D29.1 23.27,12.08 23.27,14.45 25.5,16.68 v25.5,18.72 | v53.14,19.12 53.26,19 D25.1 | v82.19,19.12 82.72,18.6 D21.1 | v112.06,19.12 111.46,18.51 111.46,12.42 111.93,11.94 D17.1 | v141.33,19.12 141.65,18.8 D13.1 | v171.2,19.12 170.79,18.72 170.79,12.62 171.11,12.3 D9.1 | v200.46,19.12 200.58,19 D5.1
  Top 0.254: D29.1 23.79,11.32 D29.1_TOP | D25.1 53.26,11.32 D25.1_TOP | D21.1 82.72,11.32 D21.1_TOP | D17.1 111.93,11.32 D17.1_TOP | D13.1 141.65,11.32 D13.1_TOP | D9.1 171.11,11.32 D9.1_TOP | D5.1 200.58,11.32 D5.1_TOP | D1.1 230.04,11.32 D1.1_TOP
  Top 0.406: RN1.P$1 226.04,18.92 v223.22,18.92
  Bottom 0.203: D29.1_BOTTOM 25.31,11.56 D29.1 | D25.1_BOTTOM 54.77,11.56 D25.1 | D21.1_BOTTOM 84.24,11.56 D21.1 | D17.1_BOTTOM 113.45,11.56 D17.1 | D13.1_BOTTOM 143.16,11.56 D13.1 | D9.1_BOTTOM 172.63,11.56 D9.1 | D5.1_BOTTOM 202.09,11.56 D5.1 | D1.1 231.56,11.56 D1.1_BOTTOM 232.89,10.31 234.39,12.52 234.39,14.86 232.56,16.68 231.14,16.68 230.12,15.67 227.48,15.67 227.28,15.87 227.28,16.48 226.67,17.09 224.64,17.09 223.83,17.9 222.81,17.9 222.4,18.31 | v25.5,18.72 25.91,18.31 28.75,18.31 29.97,19.53 31.6,19.53 32.41,18.72 37.08,18.72 37.9,19.53 39.12,19.53 39.93,18.72 41.55,18.72 42.37,19.53 46.23,19.53 47.04,18.72 49.28,18.72 50.09,19.53 52.12,19.53 52.53,19.12 v53.14,19.12 53.54,18.72 54.76,18.72 55.58,19.53 57.2,19.53 58.01,18.72 66.34,18.72 67.16,19.53 68.38,19.53 69.19,18.72 70.61,18.72 71.43,19.53 75.29,19.53 76.1,18.72 78.33,18.72 79.15,19.53 81.18,19.53 81.59,19.12 v82.19,19.12 82.6,18.72 84.02,18.72 84.84,19.53 86.67,19.53 87.48,18.72 95.2,18.72 96.01,19.53 97.23,19.53 98.04,18.72 100.69,18.72 101.5,19.53 105.16,19.53 105.97,18.72 108.2,18.72 109.02,19.53 111.05,19.53 111.46,19.12 111.86,19.12 | 111.86,19.12 v112.06,19.12 | 111.86,19.12 112.27,18.72 113.08,18.72 113.89,19.53 115.52,19.53 116.33,18.72 125.07,18.72 125.88,19.53 127.1,19.53 127.91,18.72 129.74,18.72 130.56,19.53 134.42,19.53 135.23,18.72 137.47,18.72 138.28,19.53 140.31,19.53 140.72,19.12 v141.33,19.12 141.73,18.72 142.95,18.72 143.76,19.53 145.39,19.53 146.2,18.72 154.33,18.72 155.14,19.53 156.36,19.53 157.18,18.72 159.82,18.72 160.63,19.53 164.49,19.53 165.3,18.72 167.34,18.72 168.15,19.53 170.18,19.53 170.59,19.12 v171.2,19.12 171.6,18.72 172.21,18.72 173.23,19.73 175.06,19.73 176.07,18.72 183.59,18.72 184.4,19.53 185.62,19.53 186.44,18.72 189.08,18.72 189.89,19.53 193.55,19.53 194.36,18.72 196.6,18.72 197.41,19.53 199.44,19.53 199.85,19.12 v200.46,19.12 200.86,18.72 204.32,18.72 205.13,19.53 206.76,19.53 207.57,18.72 213.67,18.72 214.48,19.53 215.7,19.53 216.92,18.31 218.75,18.31 219.56,19.12 221.59,19.12 222.4,18.31
  Bottom 0.203: v223.22,18.92 222.61,18.31 222.4,18.31
L1_R2
  Top 0.406: IC2.21 | IC2.21 224.03,22.58 224.23,22.37 225.04,22.37 225.76,21.66 226.67,21.66 226.93,21.4 RN1.P$7
L1_R2_LED  (via drill 0.43)
  Top 0.203: 16.43,11.32 15.95,11.8 15.95,14.65 17.58,16.28 v17.58,18.31 | v45.62,18.72 45.89,18.44 D26.1 | v74.88,18.72 75.35,18.24 D22.1 | v104.75,18.72 104.82,18.65 D18.1 | v134.01,18.72 134.28,18.44 D14.1 | v164.08,18.72 163.75,18.44 D10.1 | v193.14,18.72 193.21,18.65 D6.1 | v223.22,17.09 222.2,16.07 222.2,12.01 222.65,11.56 D2.1
  Top 0.254: D30.1 16.43,11.32 D30.1_TOP | D26.1 45.89,11.32 D26.1_TOP | D22.1 75.35,11.32 D22.1_TOP | D18.1 104.82,11.32 D18.1_TOP | D14.1 134.28,11.32 D14.1_TOP | D10.1 163.75,11.32 D10.1_TOP | D6.1 193.21,11.32 D6.1_TOP | D2.1 222.67,11.32 D2.1_TOP
  Top 0.406: RN1.P$2 226.87,18.77 226.87,17.7 226.26,17.09 v223.22,17.09
  Bottom 0.203: D30.1_BOTTOM 17.94,11.56 D30.1 | D26.1_BOTTOM 47.41,11.56 D26.1 | D22.1_BOTTOM 76.87,11.56 D22.1 | D18.1_BOTTOM 106.33,11.56 D18.1 | D14.1_BOTTOM 135.8,11.56 D14.1 | D10.1_BOTTOM 165.26,11.56 D10.1 | D6.1_BOTTOM 194.73,11.56 D6.1 | D2.1_BOTTOM 224.19,11.56 D2.1 | v17.58,18.31 18.39,17.5 20.22,17.5 21.44,18.72 22.86,18.72 23.67,17.9 28.96,17.9 30.18,19.12 31.39,19.12 32.21,18.31 37.29,18.31 38.1,19.12 38.91,19.12 39.73,18.31 41.76,18.31 42.57,19.12 44.6,19.12 45.01,18.72 v45.62,18.72 46.03,18.31 49.48,18.31 50.29,19.12 51.92,19.12 52.73,18.31 54.97,18.31 55.78,19.12 57,19.12 57.81,18.31 66.55,18.31 67.36,19.12 68.17,19.12 68.99,18.31 70.81,18.31 71.63,19.12 74.07,19.12 74.47,18.72 v74.88,18.72 75.29,18.31 78.54,18.31 79.35,19.12 80.98,19.12 81.79,18.31 84.23,18.31 85.04,19.12 86.46,19.12 87.27,18.31 95.4,18.31 96.22,19.12 97.03,19.12 97.84,18.31 100.89,18.31 101.7,19.12 103.73,19.12 104.14,18.72 v104.75,18.72 105.16,18.31 108.41,18.31 109.22,19.12 110.85,19.12 111.66,18.31 113.28,18.31 114.1,19.12 115.32,19.12 116.13,18.31 125.27,18.31 126.09,19.12 126.9,19.12 127.71,18.31 129.95,18.31 130.76,19.12 132.79,19.12 133.2,18.72 v134.01,18.72 134.42,18.31 137.67,18.31 138.48,19.12 140.11,19.12 140.92,18.31 143.15,18.31 143.97,19.12 145.19,19.12 146,18.31 154.53,18.31 155.35,19.12 156.16,19.12 156.97,18.31 160.02,18.31 160.83,19.12 162.87,19.12 163.27,18.72 v164.08,18.72 164.49,18.31 167.54,18.31 168.35,19.12 169.98,19.12 170.79,18.31 172.42,18.31 173.43,19.33 174.85,19.33 175.87,18.31 183.79,18.31 184.61,19.12 185.42,19.12 186.23,18.31 189.28,18.31 190.09,19.12 192.13,19.12 192.53,18.72 192.94,18.72
  Bottom 0.203: 192.94,18.72 v193.14,18.72 | 192.94,18.72 193.35,18.31 196.8,18.31 197.61,19.12 199.24,19.12 200.05,18.31 204.52,18.31 205.33,19.12 206.55,19.12 207.37,18.31 213.87,18.31 214.68,19.12 215.49,19.12 216.71,17.9 218.95,17.9 219.76,18.72 221.39,18.72 223.01,17.09 v223.22,17.09
L1_R3
  Top 0.406: IC2.22 226.09,22.37 226.87,22.37 227.73,21.52 RN1.P$6
L1_R3_LED  (via drill 0.43)
  Top 0.203: D31.1 8.84,11.78 8.84,14.65 10.87,16.68 v10.87,17.09 | v38.51,18.31 38.52,18.29 D27.1 | v67.77,18.31 67.99,18.09 D23.1 | v96.62,18.31 97.45,17.48 D19.1 | v126.49,18.31 126.66,18.14 D15.1 | v155.75,18.31 156.38,17.68 D11.1 | v185.01,18.31 185.84,17.48 D7.1 | v215.09,18.31 215.31,18.09 D3.1 214.84,11.56 214.07,10.79 214.07,8.96 214.48,8.56 228.09,8.56 228.5,8.96 228.5,11.81 229.11,12.42 229.11,16.89 227.89,18.11 227.89,18.67 RN1.P$3
  Top 0.254: D31.1 9.06,11.32 D31.1_TOP | D27.1 38.52,11.32 D27.1_TOP | D23.1 67.99,11.32 D23.1_TOP | D19.1 97.45,11.32 D19.1_TOP | D15.1 126.66,11.32 D15.1_TOP | D11.1 156.38,11.32 D11.1_TOP | D7.1 185.84,11.32 D7.1_TOP | D3.1 215.31,11.32 D3.1_TOP
  Bottom 0.203: D31.1_BOTTOM 10.58,11.56 D31.1 | D27.1_BOTTOM 40.04,11.56 D27.1 | D23.1_BOTTOM 69.5,11.56 D23.1 | D19.1_BOTTOM 98.97,11.56 D19.1 | D15.1_BOTTOM 128.18,11.56 D15.1 | D11.1_BOTTOM 157.9,11.56 D11.1 | D7.1_BOTTOM 187.36,11.56 D7.1 | D3.1_BOTTOM 216.82,11.56 D3.1 | v10.87,17.09 11.28,16.68 12.9,16.68 13.11,16.89 13.11,17.5 13.51,17.9 14.33,17.9 15.14,17.09 20.42,17.09 21.64,18.31 22.66,18.31 23.47,17.5 29.16,17.5 30.38,18.72 31.19,18.72 32,17.9 38.1,17.9 v38.51,18.31 38.91,17.9 41.96,17.9 42.77,18.72 44.4,18.72 45.21,17.9 49.68,17.9 50.5,18.72 51.71,18.72 52.53,17.9 55.17,17.9 55.98,18.72 56.79,18.72 57.61,17.9 67.36,17.9 v67.77,18.31 68.17,17.9 71.02,17.9 71.83,18.72 73.66,18.72 74.47,17.9 78.74,17.9 79.55,18.72 80.77,18.72 81.59,17.9 84.43,17.9 85.24,18.72 86.26,18.72 87.07,17.9 96.22,17.9 v96.62,18.31 97.03,17.9 101.09,17.9 101.91,18.72 103.53,18.72 104.34,17.9 108.61,17.9 109.42,18.72 110.64,18.72 111.46,17.9 113.49,17.9 114.3,18.72 115.11,18.72 115.93,17.9 126.09,17.9 v126.49,18.31 126.9,17.9 130.15,17.9 130.96,18.72 132.59,18.72 133.4,17.9 137.87,17.9 138.68,18.72 139.9,18.72 140.72,17.9 143.36,17.9 144.17,18.72 144.98,18.72 145.8,17.9 155.35,17.9 v155.75,18.31 156.16,17.9 160.22,17.9 161.04,18.72 162.66,18.72 163.47,17.9 167.74,17.9 168.55,18.72 169.77,18.72 170.59,17.9 172.62,17.9 173.63,18.92 174.65,18.92 175.67,17.9 184.61,17.9 v185.01,18.31 185.42,17.9 189.48,17.9 190.3,18.72 191.92,18.72 192.74,17.9 197,17.9 197.81,18.72 199.03,18.72 199.85,17.9 204.72,17.9 205.54,18.72 206.35,18.72 207.16,17.9 214.68,17.9 v215.09,18.31
L1_R4
  Top 0.406: IC2.23 227.18,24.88 227.18,23.08 228.53,21.73 RN1.P$5
L1_R4_LED  (via drill 0.43)
  Top 0.203: 2.38,10.63 2.44,8.95 v2.24,8.76 | v31.8,8.35 32.17,8.72 D28.1_TOP | v61.47,8.35 61.64,8.52 D24.1_TOP | v91.14,8.35 91.1,8.39 D20.1_TOP | v120.19,8.35 120.31,8.47 D16.1_TOP | v149.86,8.35 150.03,8.52 D12.1_TOP | v179.32,8.35 179.49,8.52 D8.1_TOP | v208.79,8.96 208.96,9.33 D4.1_TOP | D4.1 207.52,11.56 206.76,10.79 206.76,8.76 207.77,7.74 227.89,7.74 228.91,8.76 228.91,11.6 229.51,12.21 229.51,17.85 RN1.P$4
  Top 0.254: D32.1 1.69,11.32 2.38,10.63 D32.1_TOP | D28.1 31.16,11.32 D28.1_TOP | D24.1 60.62,11.32 D24.1_TOP | D20.1 90.09,11.32 D20.1_TOP | D16.1 119.3,11.32 D16.1_TOP | D12.1 149.01,11.32 D12.1_TOP | D8.1 178.48,11.35 D8.1_TOP | D4.1 207.94,11.32 D4.1_TOP
  Bottom 0.203: D32.1_BOTTOM 3.21,11.56 D32.1 | D28.1_BOTTOM 32.67,11.56 D28.1 | D24.1_BOTTOM 62.14,11.56 D24.1 | D20.1_BOTTOM 91.6,11.56 D20.1 | D16.1_BOTTOM 120.81,11.56 D16.1 | D12.1_BOTTOM 150.53,11.56 D12.1 | D8.1_BOTTOM 179.99,11.58 D8.1 | D4.1_BOTTOM 209.46,11.56 D4.1 | v2.24,8.76 31.39,8.76 v31.8,8.35 32.21,8.76 61.06,8.76 v61.47,8.35 61.87,8.76 90.73,8.76 v91.14,8.35 91.54,8.76 119.79,8.76 v120.19,8.35 120.6,8.76 149.45,8.76 v149.86,8.35 150.27,8.76 178.92,8.76 v179.32,8.35 179.73,8.76 208.18,8.76 208.38,8.96 v208.79,8.96
MUX_D0
  Top 0.406: IC5.11 203.6,23.7 201.47,25.83 201.47,28.47 203.71,30.7 209.4,30.7 212.85,34.16 215.75,34.16 IC2.44
MUX_D1
  Top 0.406: IC5.10 203.96,24.35 202.29,26.03 202.29,28.27 204.01,29.99 209.8,29.99 213.25,33.43 IC2.1
MUX_D2
  Top 0.406: IC5.9 204.33,25 203.1,26.23 203.1,28.06 204.32,29.28 210.41,29.28 213.77,32.63 IC2.2
MUX_EN  (via drill 0.41)
  Top 0.406: v210.01,24.41 210.06,24.35 IC5.7 | IC2.3 214.19,31.83 212.47,30.12 v212.47,29.56 211.65,28.74 R1.1
  Top 0.508: v212.47,29.56 212.45,29.53
  Bottom 0.406: v212.47,29.56 211.94,29.56 210.19,27.81 210.21,24.61 v210.01,24.41
PDI_CLOCK
  Top 0.305: X1.4 232.66,28.5 232.66,35.38 231.45,36.6 224.43,36.6 224.03,36.19 IC2.35
PDI_DATA
  Top 0.305: X1.3 232.16,26.21 232.16,35.07 231.14,36.09 225.68,36.09 IC2.34
ROW1_LED
  Top 0.406: D1.4_TOP 231.05,14.21 D1.4 | D2.4_TOP 223.69,14.21 D2.4 | D3.4_TOP 216.32,14.21 D3.4 | D4.4_TOP 208.96,14.21 D4.4 209.8,15.16 209.8,16.07 214.27,20.54 214.27,21.56 213.43,22.4 IC5.4
  Bottom 0.406: D1.4_BOTTOM 232.8,14.26 D1.4 231.8,15.11 231.34,14.65 225.04,14.65 224.59,15.11 D2.4 | D2.4_BOTTOM 225.44,14.26 D2.4 | D3.4_BOTTOM 218.07,14.26 D3.4 | D4.4_BOTTOM 210.71,14.26 D4.4 211.18,15.11 211.63,14.65 213.26,14.65 213.67,15.06 D3.4 | D2.4 D3.4
  pour Bottom (no thermals): 236.02,18.11 206.35,18.11 206.35,5.51 236.02,5.51
  pour Top (no thermals): 236.02,18.11 206.35,18.11 206.35,5.51 236.02,5.51
ROW2_LED  (via drill 0.41)
  Top 0.406: D5.4_TOP 201.59,14.21 D5.4 | D6.4_TOP 194.22,14.21 D6.4 | D7.4_TOP 186.86,14.21 D7.4 | D8.4_TOP 179.49,14.23 D8.4 182.37,17.12 v182.37,19.94 | IC5.3 210.42,21.75 v210.01,22.17
  Bottom 0.406: D5.4_BOTTOM 203.34,14.26 D5.4 D6.4 | D6.4_BOTTOM 195.97,14.26 D6.4 | D7.4_BOTTOM 188.61,14.26 D7.4 | D8.4_BOTTOM 181.24,14.28 180.54,14.99 | D8.4 180.54,14.99 | 180.54,14.99 187.64,14.99 D7.4 | D7.4 D6.4 | v210.01,22.17 205.94,22.17 204.32,20.54 182.98,20.54 v182.37,19.94
  pour Bottom (no thermals): 177.09,18.11 205.13,18.11 205.13,5.51 177.09,5.51
  pour Top (no thermals): 205.13,18.11 205.13,5.51 177.09,5.51 177.09,18.11
ROW3_LED  (via drill 0.41)
  Top 0.406: D9.4_TOP 172.12,14.21 D9.4 172.42,15.72 172.42,18.51 173.23,19.33 177.5,19.33 177.7,19.53 v180.04,19.53 | D10.4_TOP 164.76,14.21 D10.4 | D11.4_TOP 157.39,14.21 D11.4 | D12.4_TOP 150.03,14.21 D12.4 | IC5.2 210.16,21.1 208.79,19.73 202.49,19.73 201.37,20.85 192.43,20.85 191.92,20.34 184.81,20.34 183.39,21.76 181.25,21.76 180.65,21.76 v180.04,21.15
  Bottom 0.406: D9.4_BOTTOM 173.88,14.26 D9.4 D10.4 | D10.4_BOTTOM 166.51,14.26 D10.4 | D11.4_BOTTOM 159.14,14.26 D11.4 | D12.4_BOTTOM 151.78,14.26 D12.4 D11.4 | D10.4 D11.4 | v180.04,21.15 v180.04,19.53
  pour Bottom (no thermals): 147.83,18.11 176.28,18.11 176.28,5.51 147.83,5.51
  pour Top (no thermals): 176.28,18.11 176.28,5.51 147.83,5.51 147.83,17.7 147.83,18.11
ROW4_LED
  Top 0.406: D13.4_TOP 142.66,14.21 D13.4 143.15,15.52 143.15,18.72 144.78,20.34 180.49,20.34 181.1,20.95 182.98,20.95 184.4,19.53 192.33,19.53 192.94,20.14 201.07,20.14 202.08,19.12 209.19,19.12 210.53,20.45 IC5.1 | D14.4_TOP 135.3,14.21 D14.4 | D15.4_TOP 127.68,14.21 D15.4 | D16.4_TOP 120.31,14.21 D16.4
  Bottom 0.406: D13.4_BOTTOM 144.41,14.26 D13.4 D14.4 | D14.4_BOTTOM 137.05,14.26 D14.4 | D15.4_BOTTOM 129.43,14.26 D15.4 | D16.4_BOTTOM 122.06,14.26 D16.4 D15.4 | D14.4 D15.4
  pour Top (no thermals): 117.75,18.11 146.61,18.11 146.61,5.51 117.75,5.51
  pour Bottom (no thermals): 146.61,18.11 146.61,5.51 117.75,5.51 117.75,18.11
ROW5_LED
  Top 0.406: D17.4_TOP 112.94,14.21 D17.4 113.69,15.26 113.69,18.72 116.13,21.15 178.71,21.15 180.14,22.58 183.79,22.58 184.81,21.56 201.68,21.56 202.13,21.1 IC5.15 | D18.4_TOP 105.83,14.21 D18.4 | D19.4_TOP 98.47,14.21 D19.4 | D20.4_TOP 91.1,14.21 D20.4
  Bottom 0.406: D17.4_BOTTOM 114.69,14.26 D17.4 D18.4 | D18.4_BOTTOM 107.58,14.26 D18.4 | D19.4_BOTTOM 100.22,14.26 D19.4 | D20.4_BOTTOM 92.85,14.26 D20.4 D19.4 | D18.4 D19.4
  pour Bottom (no thermals): 116.94,18.11 116.94,5.51 88.49,5.51 88.49,18.11
  pour Top (no thermals): 116.94,18.11 116.94,5.51 88.49,5.51 88.49,18.11
ROW6_LED
  Top 0.406: D21.4_TOP 83.73,14.21 D21.4 | D22.4_TOP 76.37,14.21 D22.4 | D23.4_TOP 69,14.21 D23.4 | D24.4_TOP 61.64,14.21 D24.4 69.39,21.97 178.41,21.97 179.83,23.39 184.2,23.39 185.22,22.37 201.88,22.37 202.5,21.75 IC5.14
  Bottom 0.406: D21.4_BOTTOM 85.48,14.26 D21.4 D22.4 | D22.4_BOTTOM 78.12,14.26 D22.4 | D23.4_BOTTOM 70.75,14.26 D23.4 | D24.4_BOTTOM 63.39,14.26 D24.4 D23.4 | D23.4 D22.4
  pour Bottom (no thermals): 87.68,18.11 87.68,5.51 59.23,5.51 59.23,18.11
  pour Top (no thermals): 87.68,18.11 87.68,5.51 59.23,5.51 59.23,18.11
ROW7_LED
  Top 0.406: D25.4_TOP 54.27,14.21 D25.4 55.17,18.31 55.98,19.12 65.13,19.12 68.78,22.78 178,22.78 179.43,24.2 184.4,24.2 185.42,23.19 202.08,23.19 202.87,22.4 IC5.13 | D26.4_TOP 46.9,14.21 D26.4 | D27.4_TOP 39.54,14.21 D27.4 | D28.4_TOP 32.17,14.21 D28.4
  Bottom 0.406: D25.4_BOTTOM 56.02,14.26 D25.4 D26.4 | D26.4_BOTTOM 48.65,14.26 D26.4 | D27.4_BOTTOM 41.29,14.26 D27.4 | D28.4_BOTTOM 33.92,14.26 D28.4 D27.4 | D26.4 D27.4
  pour Bottom (no thermals): 58.01,18.11 58.01,5.51 29.97,5.51 29.97,18.11
  pour Top (no thermals): 58.01,18.11 58.01,5.51 29.97,5.51 29.97,18.11
ROW8_LED
  Top 0.406: D29.4_TOP 24.81,14.21 D29.4 29.92,19.33 44.6,19.33 45.42,20.14 64.92,20.14 68.38,23.59 177.7,23.59 179.02,24.91 184.81,24.91 185.73,24 202.29,24 203.23,23.05 IC5.12 | D30.4_TOP 17.44,14.21 D30.4 | D31.4_TOP 10.07,14.21 D31.4 | D32.4_TOP 2.71,14.21 D32.4
  Bottom 0.406: D29.4_BOTTOM 26.56,14.26 D29.4 D30.4 | D30.4_BOTTOM 19.19,14.26 D30.4 | D31.4_BOTTOM 11.82,14.26 D31.4 | D32.4_BOTTOM 4.46,14.26 D32.4 4.93,15.11 6.1,13.94 8.33,13.94 9.45,15.06 D31.4 | D30.4 D31.4
  pour Top (no thermals): 28.75,27.45 28.75,-0.18 0.71,-0.18 0.71,27.45
  pour Bottom (no thermals): 28.75,27.45 28.75,-0.18 0.71,-0.18 0.71,27.45
SEC_MOSI  (via drill 0.41)
  Top 0.508: v219.05,25.22 219.23,25.04 IC2.15
  Bottom 0.254: v219.05,25.22 219.05,25.52 226.87,33.35 X2.3
SEC_SCK  (via drill 0.41)
  Top 0.508: v220.88,25.32 220.83,25.27 IC2.17
  Bottom 0.203: 228.14,37 228.14,38.99
  Bottom 0.254: v220.88,25.32 220.88,26.64 228.14,33.91 228.14,37 | X2.4 224.87,38.25 226.06,39.44 227.69,39.44 228.14,38.99

## Text on the board
tPlace: DAVID M. (C) 2010 | ANIBIKE | 2V7 BT